# Altium PCB Transfer_V1_Pcb.PcbDoc
Units mm, origin at the board's own origin, x right, y up, seen from the top; angles counter-clockwise.
Board outline 60.1 x 57.66 mm, 2 copper layers (Top Layer, Bottom Layer); 38 components, 24 nets, 108 pads, 10 vias.
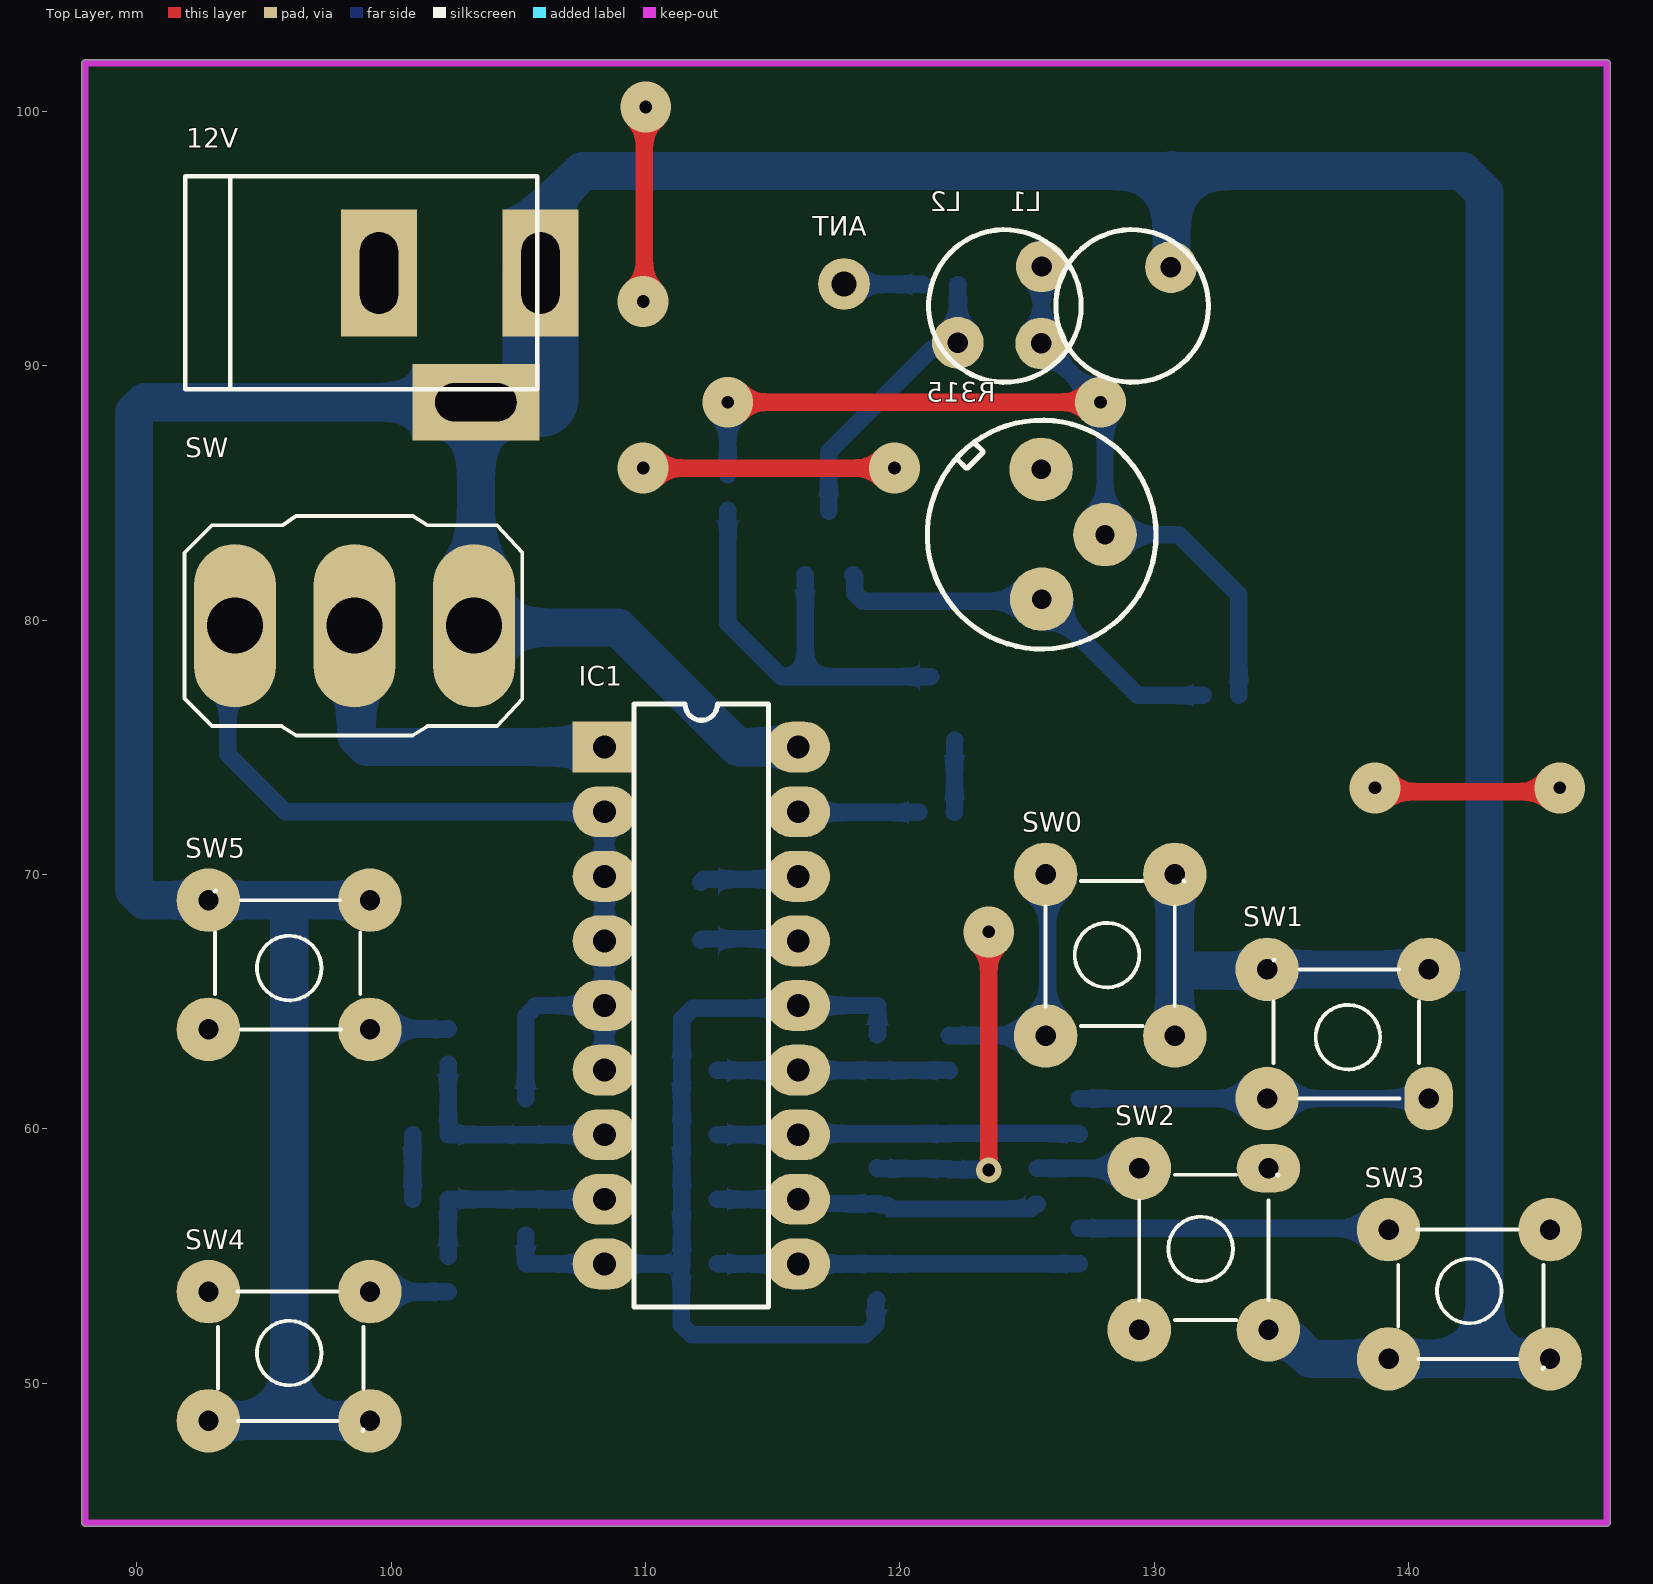
[diagram p0: Top Layer view]
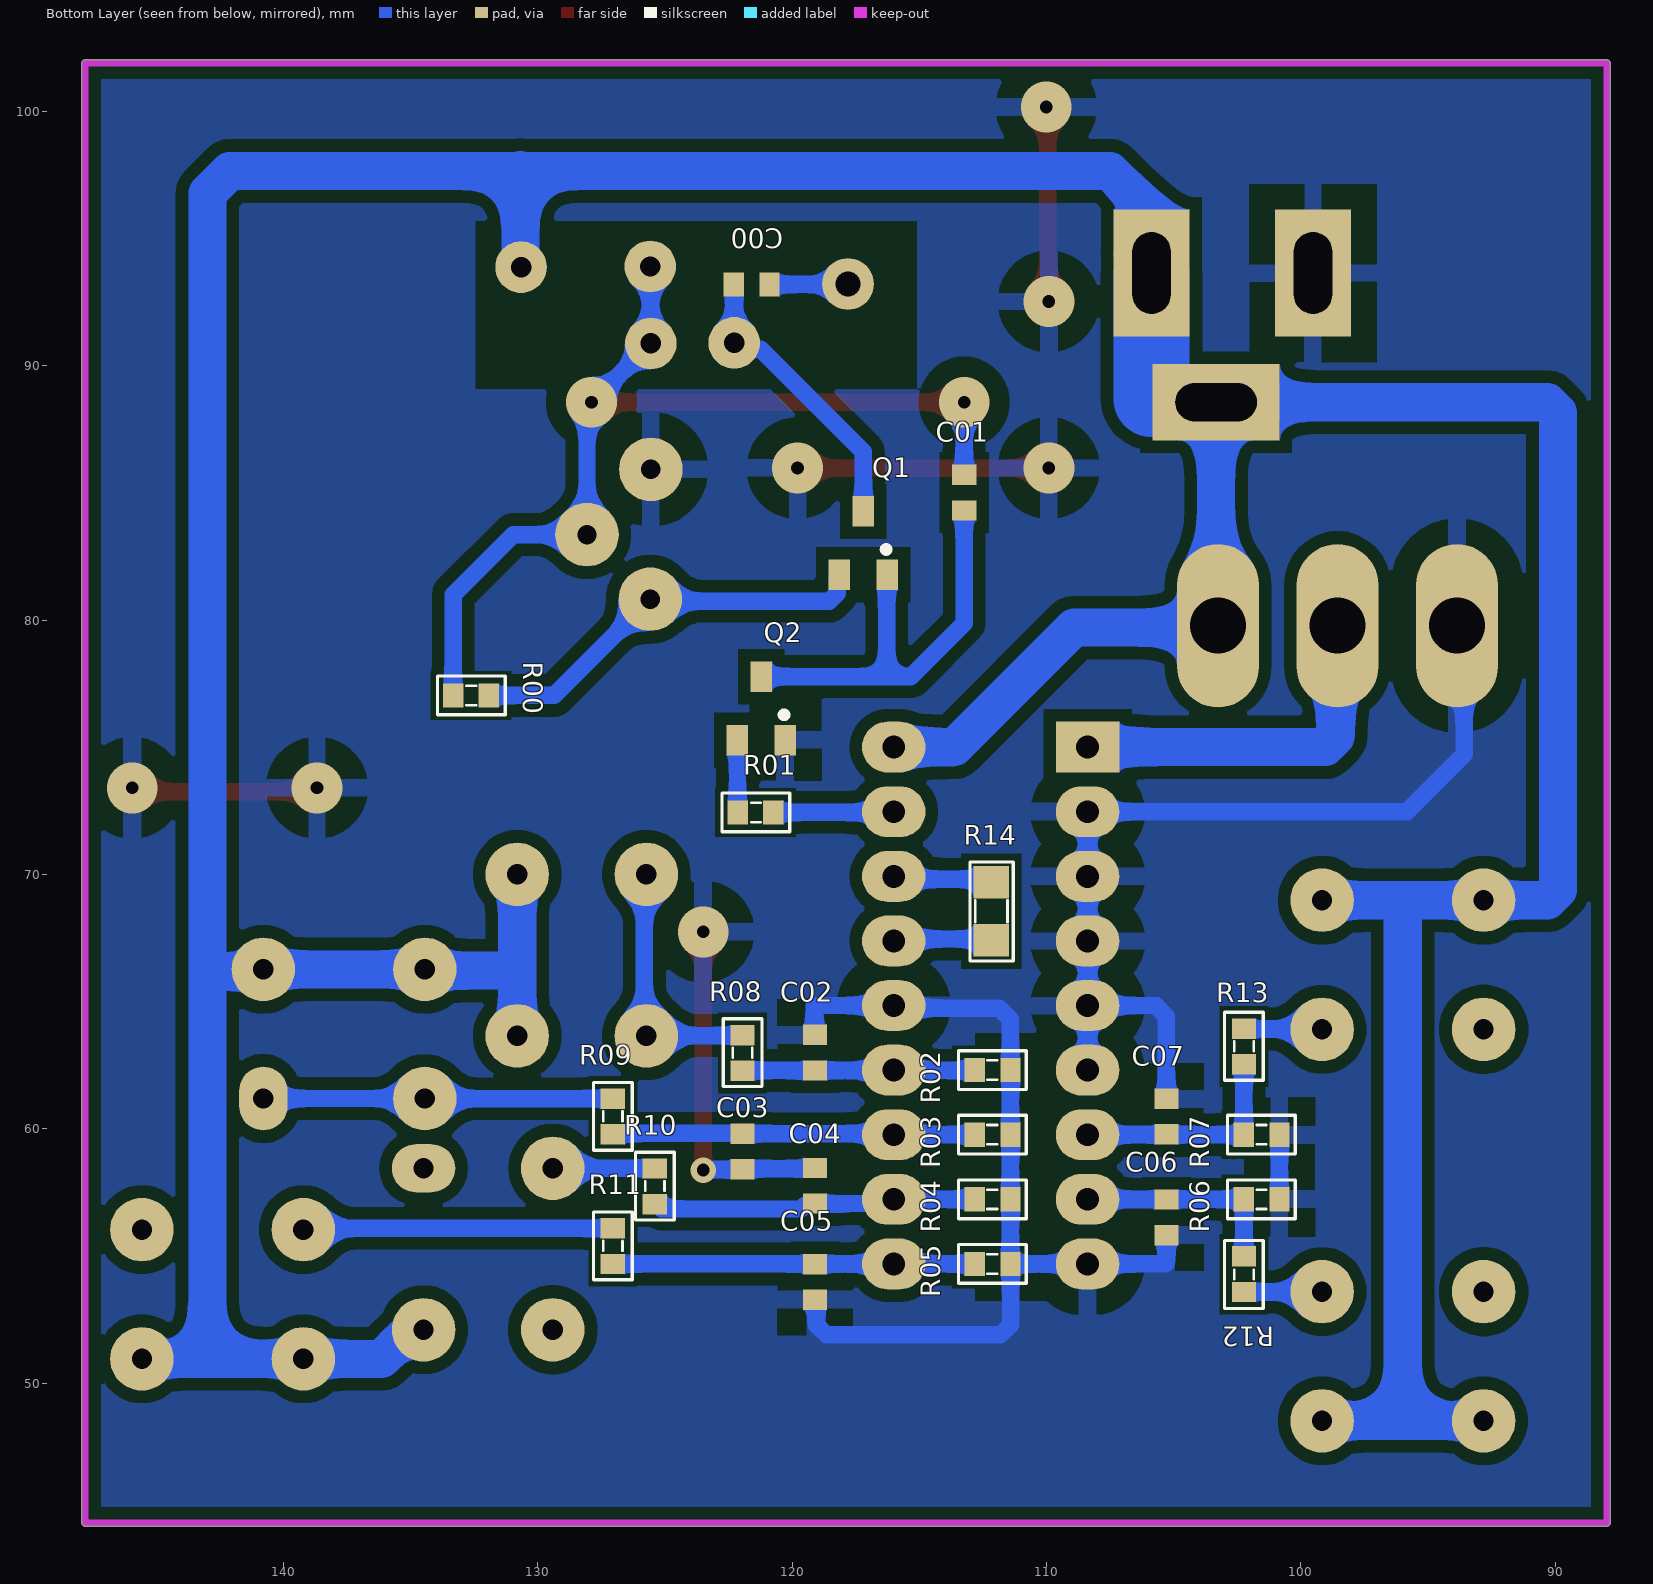
[diagram p1: Bottom Layer view, seen from below]
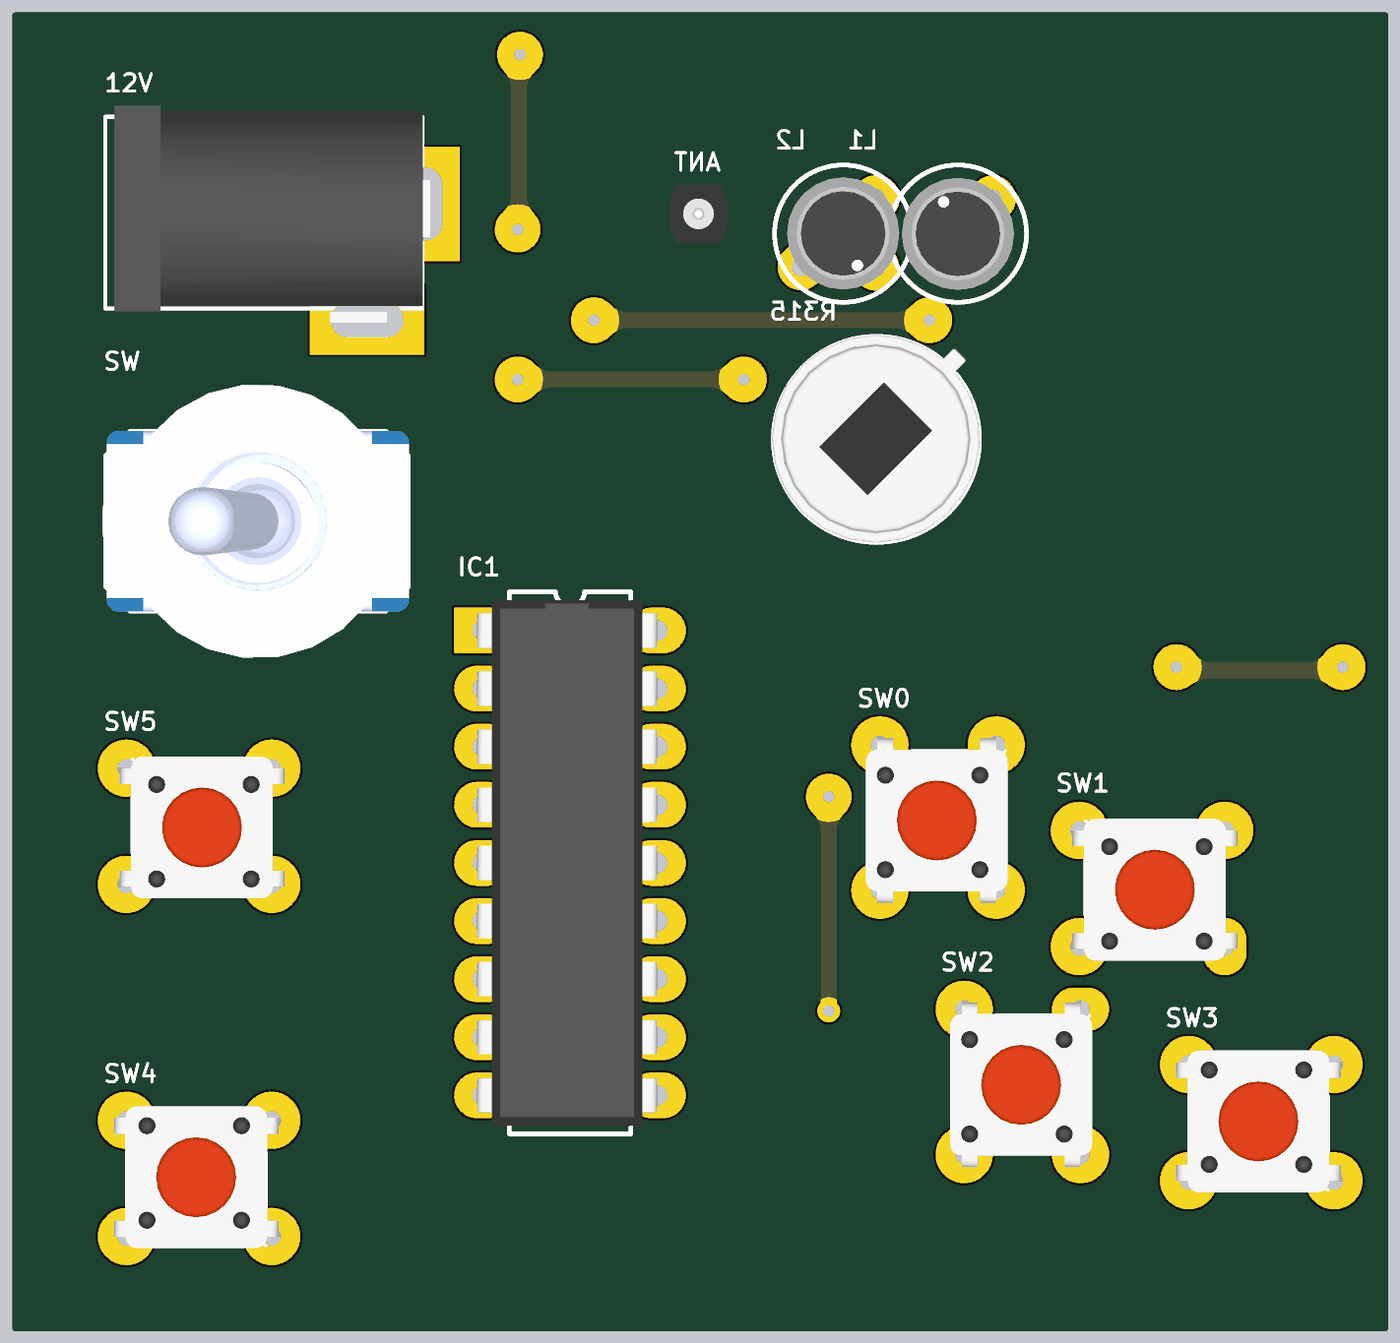
[diagram p2: 3D render of the assembled board from above, using the file's embedded part models]
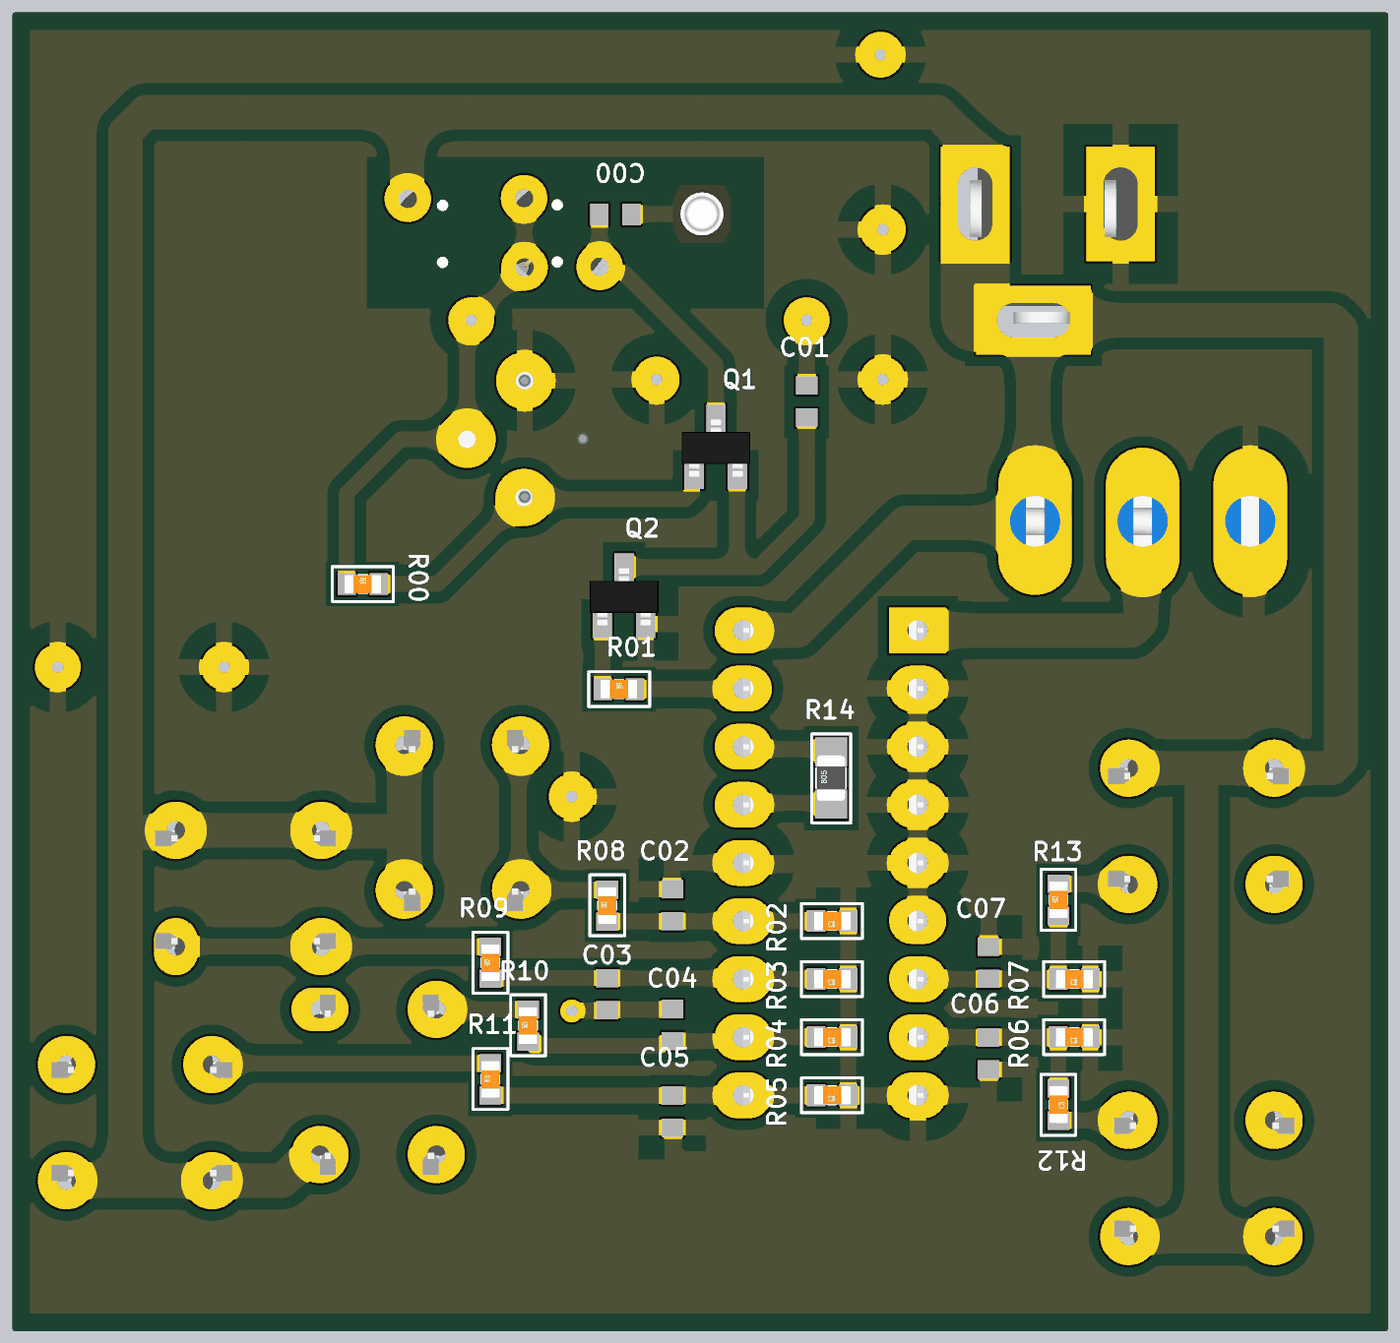
[diagram p3: 3D render of the assembled board from below, using the file's embedded part models]

## Layer stack, top to bottom
Top Solder: solder mask 0.0102, Solder Resist, Dk 3.5
Top Layer: signal copper 0.0356
Dielectric 1: dielectric 0.32, FR-4, Dk 4.8
Bottom Layer: signal copper 0.0356
Bottom Solder: solder mask 0.0102, Solder Resist, Dk 3.5

## Board outline
87.833,44.501 87.833,101.905 cw(c87.96,101.905) 87.96,102.032 147.803,102.032 cw(c147.803,101.905) 147.93,101.905 147.93,44.501 cw(c147.803,44.501) 147.803,44.373 87.96,44.373 cw(c87.96,44.501)

## Design rules (kind name [scope] priority, off if disabled: settings)
Clearance [All] p1: gap=0.5 ignorepadtopadclearanceinfootprint=FALSE except(0.6: Arc-Via Track-Via SMDPad-Via THPad-Via Via-Via Via-Text Via-Hole; 0.8: Via-Fill Via-Poly Via-Region)
PolygonConnect [All] p1: connectstyle=Relief reliefconductorwidth=0.7 reliefentries=4 polygonreliefangle="90 Angle" airgapwidth=1
RoutingVias [All] p1: holewidth=0.711 width=1.27 viastyle="Through Hole" minholewidth=0.127 minwidth=0.254 maxholewidth=1.5 maxwidth=3
SolderMaskExpansion [All] p1: expansion=0.102 istentingtop=FALSE
Width [All] p1: maxlimit=5 minlimit=0.254 preferedwidth=0.686 minimp=50.000000 maximp=50.000000 favimp=50.000000
30 further rules are at their usual default settings.

## Components (designator, comment, footprint, x,y, rotation, side; value= is the part's Value field where it differs from the comment)
12V "JACK DC 5.5" "JACK DC 5.5" 102.692,91.11 r0 top value="Jac DC"
ANT "Test Point" TP 117.805,93.218 r180 top
C00 "Cap Non-Pol SMD" CAP-SM-0603 121.59,93.193 r0 bottom value=7pF
C01 "Cap Non-Pol SMD" CAP-SM-0603 113.233,85.014 r270 bottom value=7p
C02 "Cap Non-Pol SMD" CAP-SM-0603 119.101,62.992 r270 bottom value=100nF
C03 "Cap Non-Pol SMD" CAP-SM-0603 121.945,59.106 r90 bottom value=100nF
C04 "Cap Non-Pol SMD" CAP-SM-0603 119.101,57.76 r270 bottom value=100nF
C05 "Cap Non-Pol SMD" CAP-SM-0603 119.101,53.975 r90 bottom value=100nF
C06 "Cap Non-Pol SMD" CAP-SM-0603 105.283,56.515 r90 bottom value=100nF
C07 "Cap Non-Pol SMD" CAP-SM-0603 105.283,60.477 r270 bottom value=100nF
IC1 "PT2262" DIP18 112.192,64.846 r270 top
L1 "8T" L-DIP-M-5.3#1 129.134,92.354 r90 top value="150 mH"
L2 "3T" L-DIP-M-5.3#2 124.13,92.354 r270 top value="150 mH"
Q1 "2SC3356" SOT23B 117.196,83.033 r180 bottom
Q2 "S8050" SOT23B 121.209,76.53 r180 bottom
R00 "27K" RES-SM-0603 133.313,77.038 r180 bottom
R01 "27K" RES-SM-0603 122.123,72.441 r180 bottom
R02 "RESISTOR SMD" RES-SM-0603 111.43,62.306 r0 bottom
R03 "RESISTOR SMD" RES-SM-0603 111.43,59.766 r0 bottom
R04 "RESISTOR SMD" RES-SM-0603 111.43,57.226 r0 bottom
R05 "RESISTOR SMD" RES-SM-0603 111.43,54.686 r0 bottom
R06 "RESISTOR SMD" RES-SM-0603 100.849,57.226 r0 bottom
R07 "RESISTOR SMD" RES-SM-0603 100.849,59.766 r0 bottom
R08 "RESISTOR SMD" RES-SM-0603 121.945,62.292 r90 bottom value=2.7K
R09 "RESISTOR SMD" RES-SM-0603 127.051,59.792 r90 bottom value=2.7K
R10 "RESISTOR SMD" RES-SM-0603 125.4,57.048 r90 bottom value=2.7K
R11 "RESISTOR SMD" RES-SM-0603 127.051,54.697 r90 bottom value=2.7K
R12 "RESISTOR SMD" RES-SM-0603 102.235,54.966 r270 bottom
R13 "RESISTOR SMD" RES-SM-0603 102.235,62.546 r90 bottom
R14 "RESISTOR SMD" RES-SM-0805 112.166,67.412 r90 bottom value=4.7M
R315 "BXR513A" BXR315A 125.552,83.388 r270 top
SW "MTS-102" MTS-102 98.553,79.781 r270 top
SW0 "SW" SW2-DIP#1 125.73,63.652 r90 top value="Button chip 4 pin"
SW1 "SW" SW2-DIP#2 140.792,61.189 r180 top value="Button chip 4 pin"
SW2 "SW" SW2-DIP#3 129.413,52.095 r90 top value="Button chip 4 pin"
SW3 "SW" SW2-DIP#1 139.217,56.032 r0 top value="Button chip 4 pin"
SW4 "SW" SW2-DIP#1 92.812,53.594 r0 top value="Button chip 4 pin"
SW5 "SW" SW2-DIP#1 99.162,63.906 r180 top value="Button chip 4 pin"

## Footprints (in the part's own frame and the unit in brackets; to place one, negate y for a bottom-side part, rotate by r counter-clockwise, add the part's x,y. Pads: shape width x height; smd on the part's side, far side on the other; paste and mask are expansions set on the pad)
BXR315A [mil] "Xtal for RF"
  round 98.43 hole 30: 1(-100,0) 2(1,99) 3(101,1)
  silkscreen extent -176,-176 178,178, body extent -179,-179 179,179, height 187
CAP-SM-0603 [mm] "SMD Ceramic Capacitor Size 0603"
  rect 0.8x0.95 smd: 1(-0.7,0) 2(0.7,0)
  body extent -0.85,-0.45 0.85,0.45, height 0.6
DIP18 [mm] "DIP; 18 Leads; Row Spacing 7.62 mm; Pitch 2.54 mm"
  rect 2x2.5 hole 0.9: 1(-10.16,-3.81)
  oval 2x2.5 hole 0.9: 2(-7.62,-3.81) 3(-5.08,-3.81) 4(-2.54,-3.81) 5(0,-3.81) 6(2.54,-3.81) 7(5.08,-3.81) 8(7.62,-3.81) 9(10.16,-3.81) 10(10.16,3.81) 11(7.62,3.81) 12(5.08,3.81) 13(2.54,3.81) 14(0,3.81) 15(-2.54,3.81) 16(-5.08,3.81) 17(-7.62,3.81) 18(-10.16,3.81)
  silkscreen extent -11.85,-2.65 11.85,2.65, body extent -11.49,-4.06 11.5,3.81, height 5.08
"JACK DC 5.5" [mm] "Jac DC input"
  rect 3x5 hole 1.5 slot 3.2 at 90 deg: 1(3.175,2.54) 2(-3.175,2.54)
  rect 5x3 hole 1.5 slot 3.2 at 0 deg: 3(0.635,-2.54)
  silkscreen extent -10.79,-2.03 3.05,6.35, body extent -10.42,-2.67 3.4,6.84, height 11.02
L-DIP-M-5.3#1 [mil] "THT Inductor, 2-Leads, Body 5.3  mm"
  round 80 hole 31.5: 1(60.08,-60) 2(-57.99,140.8)
  silkscreen extent -118,-118 118,118, body extent -97,-97 96,96, height 299
L-DIP-M-5.3#2 [mil] "THT Inductor, 2-Leads, Body 5.3  mm"
  round 80 hole 31.5: 1(-61,57) 2(57.1,-72.94)
  silkscreen extent -118,-118 118,118, body extent -97,-97 96,96, height 299
MTS-102 [mm]
  oval 6.432x3.216 hole 2.2: 1(0,4.7) 2(0,0) 3(0,-4.7)
  silkscreen extent -4.32,-6.68 4.32,6.6, body extent -6,-6.79 6,6.6, height 30.13
RES-SM-0603 [mm]
  rect 0.8x0.95 smd: 1(-0.014,0) 2(1.386,0)
  silkscreen extent -0.64,-0.76 2.03,0.76, body extent -0.11,-0.4 1.49,0.4, height 0.3
RES-SM-0805 [mil]
  rect 50x55 smd: 1(0,0) 2(90,0)
  silkscreen extent -32,-34 121,33, body extent 6,-25 84,25, height 31
SOT23B [mm] "SOT 23B"
  rect 0.85x1.2 smd: 1(0.94,-1.245) 2(0,1.25) 3(-0.95,-1.25)
  silkscreen extent 0.77,-0.38 1.02,-0.13, body extent -1.5,-1.3 1.5,1.2, height 1.06
SW2-DIP#1 [mm] "SW button 4pin, 250 x250 mil"
  round 2.5 hole 0.8: 1(0,0) 2(0,-5.08) 3(6.35,-5.08) 4(6.35,0)
  silkscreen extent 0.38,-5.46 6.1,0, body extent -0.9,-5.59 7,0.61, height 7
SW2-DIP#2 [mm] "SW button 4pin, 250 x250 mil"
  oval 1.9x2.5 hole 0.8: 1(0,0)
  round 2.5 hole 0.8: 2(0,-5.08) 3(6.35,-5.08) 4(6.35,0)
  silkscreen extent 0.38,-5.46 6.1,0, body extent -0.9,-5.59 7,0.61, height 7
SW2-DIP#3 [mm] "SW button 4pin, 250 x250 mil"
  round 2.5 hole 0.8: 1(0,0) 2(0,-5.08) 4(6.35,0)
  oval 1.9x2.5 hole 0.8: 3(6.35,-5.08)
  silkscreen extent 0.38,-5.46 6.1,0, body extent -0.9,-5.59 7,0.61, height 7
TP [mil] "Connect 1"
  round 80 hole 39: TP1(0,0)
  body extent -50,-50 50,50, height 235

## Part data
C00 C01 C02 C03 C04 C05 C06 C07: "Capacitor"
IC1: "Remote Control Encoder"
L1 L2: library part L-DIP-1, "Inductor"
Q1 Q2: library part C1815, "NPN Bipolar Transistor"
R00 R01: library part "RESISTOR SMD", "Resistor"
R02 R03 R04 R05 R06 R07 R08 R09 R10 R11 R12 R13 R14: "Resistor"
R315: library part BXR315A, "Xtal For RF"
SW: "Rectangular Cable Assemblies .100 Mini Mate Single Row Discrete Wire Cable Assembly, Terminal", Package=None, Availability=Unavailable, Check_prices=https://www.snapeda.com/parts/MTS102/Motorola/view-part/698799/?ref=eda, MF=Motorola, MP=MTS102, Price=None, SnapEDA_Link=https://www.snapeda.com/parts/MTS102/Motorola/view-part/698799/?ref=snap
SW0 SW1 SW2 SW3 SW4 SW5: library part SW4, "Switch button 4 pin"

## Via types
v1: diameter 2, hole 0.5, Top Layer to Bottom Layer, 9 vias
v2: diameter 1, hole 0.5, Top Layer to Bottom Layer, 1 vias

## Nets (pads, with @x,y where several pads share a name; then routed paths per layer and width w, separated by ;. In a path a pad name is that pad's centre, name@x,y a point inside that pad or via, vN(x,y) a via of type N, cw(c..) or ccw(c..) an arc to the next point about the centre after c; other vN are vias at no path point)
12V: 12V.1 12V.3 IC1.18 L1.1 SW0.2 SW0.3 SW1.2 SW1.3 SW2.2 SW3.2 SW3.3 SW4.2 SW4.3 SW5.2 SW5.3 SW.1 | length 221
  Bottom Layer w1.5: SW4.2 95.987,48.514 ; SW4.3 95.987,48.514 ; SW5.2 96.241,68.986 ; SW.1 103.329,79.705 108.915,79.705 113.614,75.006 IC1.18 ; SW.1@103.327,79.3 12V.3 ; 105.867,88.697 103.454,88.697 12V.3 ; 12V.1 12V.1@105.893,93.675 ; 12V.1@105.893,93.447 12V.1@105.893,93.675 ; 12V.1@106.617,94.4 12V.1@105.893,93.675 ; L1.1 130.683,93.906 130.683,97.663 ; 130.683,97.688 130.683,97.663 ; SW0.2 SW0.3 ; 130.886,66.218 134.391,66.218 SW1.3 SW1.2 140.884,66.177 142.86,66.177 142.875,66.192 ; SW2.2 134.595,51.994 135.103,51.994 136.144,50.952 SW3.2 142.995,50.952 ; SW3.3@144.882,50.952 142.995,50.952 ; 95.987,48.514 95.987,68.732 96.241,68.986 ; 96.241,68.986 SW5.3 90.292,68.986 89.891,69.388 89.891,88.168 90.292,88.57 12V.3 ; 12V.1@105.893,93.675 105.893,96.06 107.496,97.663 130.683,97.663 ; 130.683,97.663 142.116,97.663 142.995,96.784 142.995,50.952
  Bottom Layer w3: 105.867,88.697 12V.1
GND: 12V.2 C02.1 C03.1 C04.1 C05.1 C06.1 C07.1 IC1.2 IC1.3 IC1.4 IC1.5 IC1.6 IC1.9 IC1.14 Q2.1 R02.1 R03.1 R04.1 R05.1 R06.1 R07.1 R315.1 SW.3 | length 115.9
  Top Layer w0.686: v1(109.906,85.979) v1(119.786,85.979) ; v1(109.906,92.532) 109.957,92.583 109.957,100.127 v1(110.007,100.178) ; v2(123.495,58.374) v1(123.495,67.742) ; v1(138.684,73.406) 138.836,73.254 145.796,73.254 v1(145.948,73.406)
  Bottom Layer w0.686: SW.3@93.852,79.375 93.574,79.097 93.574,74.727 95.834,72.466 IC1.2 IC1.3 IC1.4 IC1.5 ; R06.1 100.838,57.229 R07.1@100.838,59.766 ; C06.1 105.283,54.712 105.308,54.686 IC1.9 R05.1 ; C07.1 105.283,64.419 105.685,64.821 ; 105.685,64.846 IC1.5 ; IC1.6 108.382,64.787 108.441,64.846 IC1.5 ; C05.1 119.05,53.224 119.05,52.294 118.648,51.892 111.806,51.892 111.404,52.294 111.404,54.554 111.416,54.565 R05.1 ; C04.1 119.128,58.433 121.918,58.433 121.961,58.39 123.479,58.39 v2(123.495,58.374) ; C02.1 119.126,63.717 119.126,64.846 IC1.14 115.418,64.846 115.367,64.795 115.367,64.786 115.326,64.745 111.857,64.745 111.416,64.303 R02.1 R03.1 R04.1 R05.1
NetANT_TP1: ANT.TP1 C00.1 | length 3.1
  Bottom Layer w0.686: ANT.TP1 117.818,93.205 120.877,93.205 C00.1
NetC00_2: C00.2 L2.2 Q1.2 | length 11.5
  Bottom Layer w0.686: Q1.2 117.196,86.614 121.228,90.646 122.02,90.646 122.283,90.91 122.283,93.186 C00.2
NetC01_1: C01.1 L1.2 L2.1 R00.1 R315.2 | length 39.3
  Top Layer w0.686: v1(113.233,88.57) v1(127.889,88.57)
  Bottom Layer w0.686: C01.1 v1(113.233,88.57) ; L2.1 125.567,93.894 125.567,90.892 L1.2 128.067,88.372 R315.2 130.962,83.363 133.328,80.998 R00.1
NetC01_2: C01.2 Q1.1 Q2.2 | length 17.3
  Bottom Layer w0.686: C01.2 113.233,79.883 115.336,77.78 116.281,77.78 ; Q1.1 116.281,81.763 116.281,77.78 ; Q2.2 116.281,77.78
NetIC1_1: IC1.1 SW.2 | length 13.9
  Bottom Layer w1.5: SW.2@98.552,79.375 98.628,79.299 98.628,75.408 99.03,75.006 IC1.1
NetIC1_15: IC1.15 R14.1 | length 3.9
  Bottom Layer w0.686: R14.1 112.217,67.462 115.926,67.462 IC1.15
NetIC1_16: IC1.16 R14.2 | length 3.9
  Bottom Layer w0.686: R14.2 112.281,69.812 115.887,69.812 IC1.16
NetIC1_17: IC1.17 R01.2 | length 4.7
  Bottom Layer w0.686: IC1.17 116.027,72.441 R01.2
NetQ1_3: Q1.3 R00.2 R315.3 | length 16.2
  Bottom Layer w0.686: Q1.3 118.228,81.7 118.228,81.056 118.537,80.747 125.501,80.747 R315.3 129.362,77.038 R00.2
NetQ2_3: Q2.3 R01.1 | length 2.8
  Bottom Layer w0.686: R01.1 122.148,72.452 122.148,75.269 Q2.3
NetR08_2: R08.2 SW0.1 SW0.4 | length 10.2
  Bottom Layer w0.686: R08.2 121.958,63.665 125.717,63.665 SW0.1 125.806,63.729 125.806,69.926 SW0.4
NetR09_2: R09.2 SW1.1 SW1.4 | length 13.7
  Bottom Layer w0.686: R09.2 127.056,61.183 134.437,61.183 SW1.4 SW1.1
NetR10_2: R10.2 SW2.4 | length 4
  Bottom Layer w0.686: R10.2@125.4,58.441 129.409,58.441 SW2.4
NetR11_2: R11.2 SW3.1 | length 11.5
  Bottom Layer w0.686: R11.2 138.481,56.083 SW3.1@138.532,56.032
NetR12_2: R12.2 SW4.4 | length 3.1
  Bottom Layer w0.686: SW4.4 99.169,53.587 102.228,53.587 R12.2
NetR13_2: R13.2 SW5.1 | length 3.1
  Bottom Layer w0.686: SW5.1 99.162,63.957 99.2,63.919 102.222,63.919 R13.2
OUT0: C02.2 IC1.13 R02.2 R08.1 | length 9.1
  Bottom Layer w0.686: R02.2 112.83,62.292 C02.2 121.931,62.292 R08.1
OUT1: C03.2 IC1.12 R03.2 R09.1 | length 14.3
  Bottom Layer w0.686: R03.2 IC1.12 ; IC1.12@116.002,59.806 C03.2 121.957,59.817 127.011,59.817 R09.1
OUT2: C04.2 IC1.11 R04.2 R10.1 | length 12.8
  Bottom Layer w0.686: R04.2 IC1.11 116.484,57.226 116.651,57.06 117.537,57.06 117.819,57.051 117.864,57.049 117.875,57.049 118.968,57.049 C04.2 119.176,57.06 119.233,57.002 119.477,57.002 119.634,56.845 125.136,56.845 125.325,57.034 R10.1
OUT3: C05.2 IC1.10 R05.2 R11.1 | length 14.2
  Bottom Layer w0.686: R05.2@112.816,54.683 119.101,54.683 R11.1
OUT4: C06.2 IC1.8 R06.2 R12.1 | length 8.4
  Bottom Layer w0.686: R12.1 R06.2 IC1.8
OUT5: C07.2 IC1.7 R07.2 R13.1 | length 8.9
  Bottom Layer w0.686: R13.1 R07.2 IC1.7
pads on no net: SW2.1 SW2.3 SW3.4 SW4.1 SW5.4

## Polygon pours and split planes (outlines as drawn)
GND on Bottom Layer "NONET_L-01_P-001" (solid, pour order 0): 147.676,101.778 88.087,101.778 87.96,44.628 147.676,44.628

## Keep-outs
Keep-Out Layer:
  lines w0.254: 87.96,44.501 87.96,101.905 147.803,101.905 147.803,44.501 87.96,44.501

## Other copper
Bottom Layer:
  pour cut-out: 132.461,95.707 115.087,95.707 115.087,89.078 132.461,89.078